# Altium PCB SNA.PcbDoc (part 4 of 6)
Units mm, origin at the board's own origin, x right, y up, seen from the top; angles counter-clockwise.
Board outline 122 x 98 mm, 4 copper layers (L1 Top Layer, L2 Inner 1, L3 Inner 2, L4 Bottom Layer), stack 1.588 mm thick; 466 components, 299 nets, 1366 pads, 4218 vias.
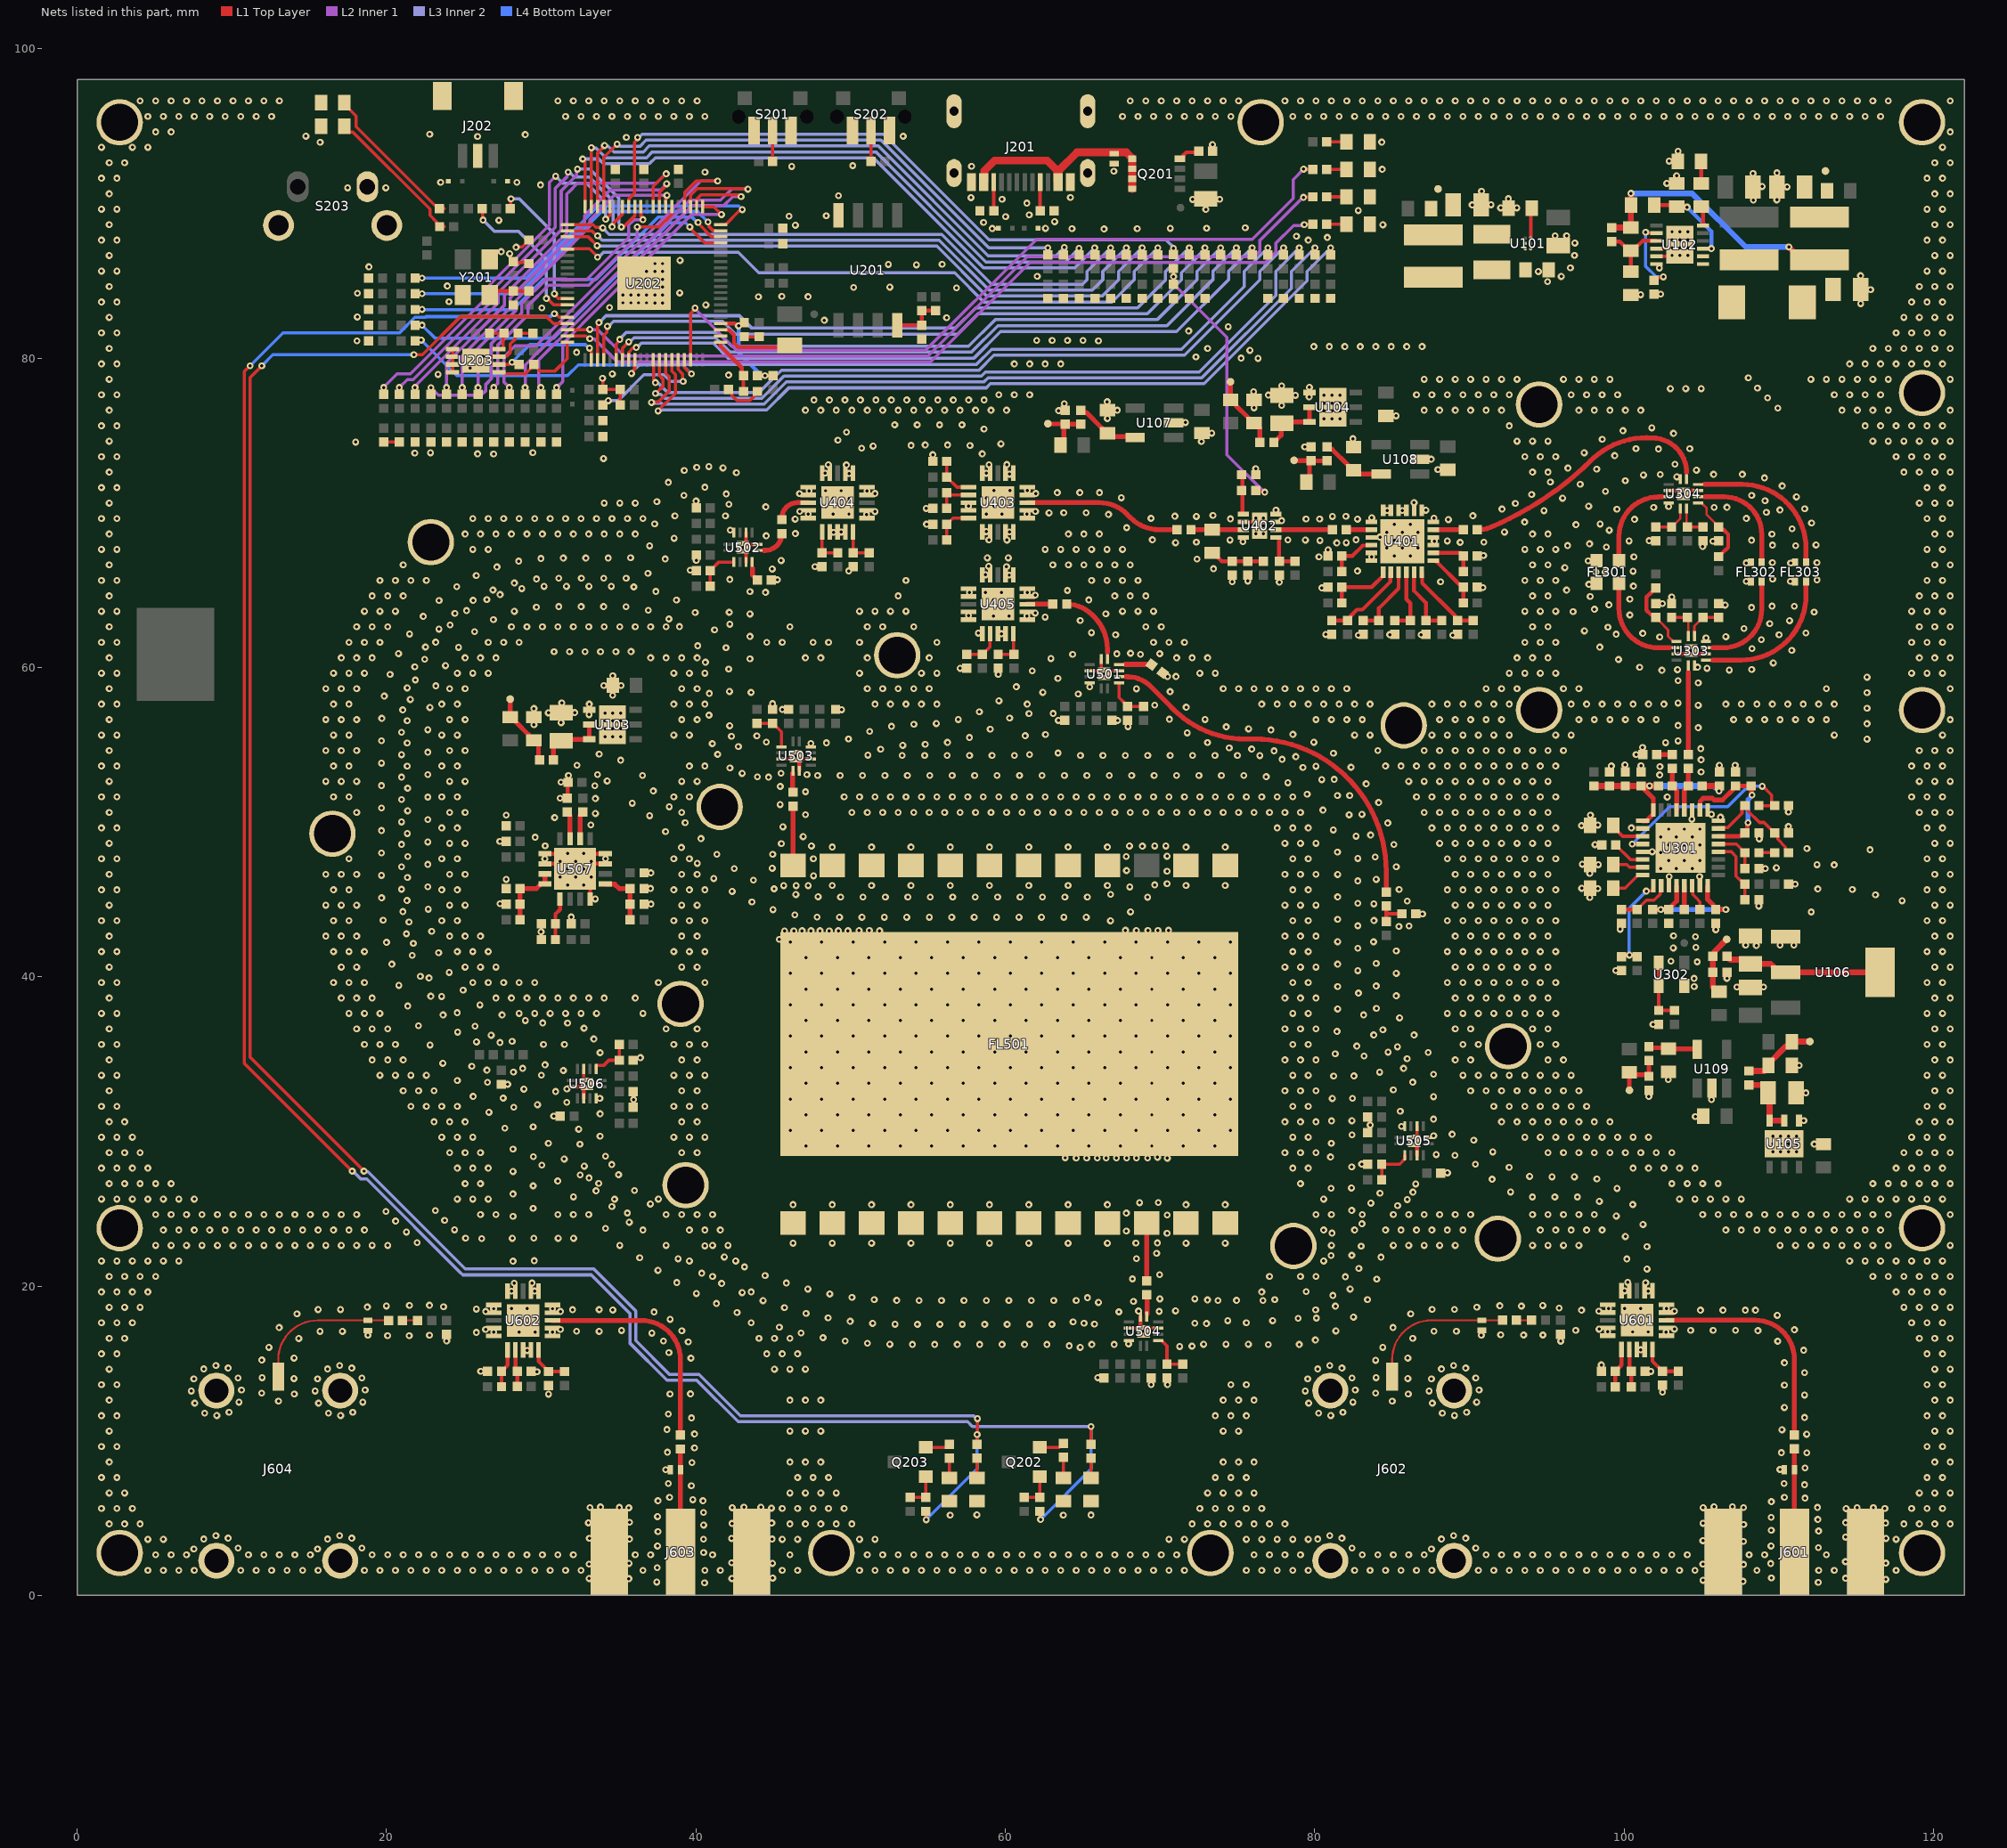
[diagram p6: the nets of this part, all layers, seen from the top]

## Via types
v1: diameter 0.45, hole 0.2, L1 Top Layer to L4 Bottom Layer, tented both sides, 4218 vias

## Nets (pads, with @x,y where several pads share a name; then routed paths per layer and width w, separated by ;. In a path a pad name is that pad's centre, name@x,y a point inside that pad or via, vN(x,y) a via of type N, cw(c..) or ccw(c..) an arc to the next point about the centre after c; other vN are vias at no path point) (continued)
GND: (continued)
  other v1: 118.572,83.625 119.572,83.625 120.572,83.625 24.033,83.647 44.036,83.963 47.241,83.972 45.548,83.995 37.338,84.074 37.846,84.074 35.276,84.08 35.784,84.08 36.292,84.08 36.8,84.08 101.064,84.096 102.349,84.138 18.116,84.186 38.947,84.215 115.929,84.418 56.835,84.539 37.338,84.582 37.846,84.582 50.19,84.561 35.784,84.588 36.292,84.588 36.8,84.588 52.533,84.589 2.072,84.625 119.072,84.625 120.072,84.625 121.072,84.625 23.922,84.666 95.041,84.936 37.338,85.09 37.846,85.09 36.292,85.096 36.8,85.096 62.063,85.281 95.929,85.273 115.272,85.326 37.338,85.598 37.846,85.598 94.453,85.593 36.8,85.604 1.572,85.625 2.572,85.625 119.572,85.625 120.572,85.625 102.275,85.822 96.518,85.83 18.86,85.897 54.25,86.027 52.435,86.051 55.91,86.064 37.338,86.106 37.846,86.106 38.969,86.314 2.072,86.625 103.599,86.63 104.107,86.63 120.072,86.625 121.072,86.625 96.786,86.644 103.599,87.138 104.107,87.138 96.807,87.432 1.572,87.625 2.572,87.625 79.572,87.625 119.572,87.625 120.572,87.625 103.091,87.646 103.599,87.646 104.107,87.646 80.807,87.8 78.814,87.877 95.533,87.902 96.269,87.902 103.091,88.154 103.599,88.154 104.107,88.154 64.305,88.364 66.377,88.343 68.523,88.364 59.151,88.377 62.588,88.388 70.658,88.385 73.005,88.4 75.504,88.423 46.429,88.583 84.397,88.619 2.072,88.625 120.072,88.625 121.072,88.625 58.584,88.765 63.18,88.814 27.258,88.904 60.014,89.14 46.017,89.176 48.419,89.196 61.541,89.262 82.805,89.538 1.572,89.625 2.572,89.625 72.951,89.614 119.572,89.625 120.572,89.625 92.015,89.712 93.06,89.712 90.172,89.904 91.385,89.91 61.388,90.021 108.341,90.219 109.859,90.227 59.782,90.271 72.097,90.255 73.849,90.27 92.513,90.307 57.776,90.372 64.202,90.384 49.213,90.492 2.072,90.625 120.072,90.625 121.072,90.625 90.772,90.781 17.482,91.004 19.949,91.004 110.522,91.064 108.914,91.09 29.948,91.2 102.752,91.291 23.488,91.365 28.428,91.36 1.572,91.625 2.572,91.625 119.572,91.625 120.572,91.625 103.387,91.782 108.323,91.932 109.869,91.973 40.584,92.02 67.016,92.08 84.355,92.201 46.183,92.387 57.813,92.392 50.131,92.44 2.072,92.625 3.072,92.625 120.072,92.625 121.072,92.625 102.899,92.731 103.477,93.365 1.572,93.625 3.572,93.625 4.572,93.625 120.572,93.625 73.388,93.8 15.709,93.948 84.324,93.959 35.496,94.265 25.884,94.323 14.784,94.342 53.395,94.34 28.963,94.447 22.793,94.466 5.072,94.625 6.072,94.625 121.072,94.625 4.572,95.625 5.572,95.625 6.572,95.625 7.572,95.625 8.572,95.625 9.572,95.625 10.572,95.625 11.572,95.625 12.572,95.625 31.572,95.625 32.572,95.625 33.572,95.625 34.572,95.625 35.572,95.625 36.572,95.625 37.572,95.625 38.572,95.625 39.572,95.625 40.572,95.625 67.572,95.625 68.572,95.625 69.572,95.625 70.572,95.625 71.572,95.625 72.572,95.625 73.572,95.625 74.572,95.625 78.572,95.625 79.572,95.625 80.572,95.625 81.572,95.625 82.572,95.625 83.572,95.625 84.572,95.625 85.572,95.625 86.572,95.625 87.572,95.625 88.572,95.625 89.572,95.625 90.572,95.625 91.572,95.625 92.572,95.625 93.572,95.625 94.572,95.625 95.572,95.625 96.572,95.625 97.572,95.625 98.572,95.625 99.572,95.625 100.572,95.625 101.572,95.625 102.572,95.625 103.572,95.625 104.572,95.625 105.572,95.625 106.572,95.625 107.572,95.625 108.572,95.625 109.572,95.625 110.572,95.625 111.572,95.625 112.572,95.625 113.572,95.625 114.572,95.625 115.572,95.625 116.572,95.625 4.072,96.625 5.072,96.625 6.072,96.625 7.072,96.625 8.072,96.625 9.072,96.625 10.072,96.625 11.072,96.625 12.072,96.625 13.072,96.625 31.072,96.625 32.072,96.625 33.072,96.625 34.072,96.625 35.072,96.625 36.072,96.625 37.072,96.625 38.072,96.625 39.072,96.625 40.072,96.625 68.072,96.625 69.072,96.625 70.072,96.625 71.072,96.625 72.072,96.625 73.072,96.625 74.072,96.625 75.072,96.625 78.072,96.625 79.072,96.625 80.072,96.625 81.072,96.625 82.072,96.625 83.072,96.625 84.072,96.625 85.072,96.625 86.072,96.625 87.072,96.625 88.072,96.625 89.072,96.625 90.072,96.625 91.072,96.625 92.072,96.625 93.072,96.625 94.072,96.625 95.072,96.625 96.072,96.625 97.072,96.625 98.072,96.625 99.072,96.625 100.072,96.625 101.072,96.625 102.072,96.625 103.072,96.625 104.072,96.625 105.072,96.625 106.072,96.625 107.072,96.625 108.072,96.625 109.072,96.625 110.072,96.625 111.072,96.625 112.072,96.625 113.072,96.625 114.072,96.625 115.072,96.625 116.072,96.625 117.072,96.625 121.072,96.625
I2C0.SCL: R229.1 U202.42 U203.6 | length 7.8
  L1 Top Layer w0.203: U203.6@27.271,79.585 U203.6@27.271,79.585 27.906,79.583 28.048,79.725 v1(28.114,79.725) 28.162,79.678 28.459,79.678 28.468,79.686 R229.1@28.569,79.585 ; v1(33.12,80.643) 33.12,80.576 33.24,80.456 33.24,79.887 U202.42@33.241,79.885
  L4 Bottom Layer w0.203: v1(28.114,79.725) 29.255,80.866 30.799,80.866 32.846,80.866 33.069,80.643 v1(33.12,80.643)
I2C0.SDA: R230.1 U202.40 U203.5 | length 6.3
  L1 Top Layer w0.203: U203.5@27.271,79.085 27.546,79.085 27.654,78.977 28.956,78.977 29.312,79.333 29.312,79.387 R230.1@29.51,79.585 29.955,79.14 30.858,79.14 31.677,79.959 31.677,81.034 31.678,81.035 U202.40@31.691,81.035
L_Booted: R209.2 U202.58 | length 50.1
  L1 Top Layer w0.203: U202.58@39.641,79.885 39.641,82.865 39.943,83.167 v1(39.943,83.234) ; v1(79.274,92.211) 79.283,92.202 R209.2@79.872,92.202
  L2 Inner 1 w0.203: v1(39.943,83.234) 39.943,83.186 42.564,80.565 42.615,80.514 54.843,80.514 61.264,86.935 61.274,86.935 62.017,87.679 75.961,87.679 78.6,90.318 78.6,91.537 v1(79.274,92.211)
L_Busy: R258.2 U202.39 | length 52.9
  L1 Top Layer w0.203: U202.39@31.691,81.435 32.879,81.435 32.941,81.373 32.949,81.373 33.073,81.25 v1(33.14,81.25) ; v1(79.313,88.621) 79.339,88.646 R258.2@79.872,88.646
  L2 Inner 1 w0.203: v1(33.14,81.25) 33.171,81.218 33.451,81.218 34.92,79.749 42.564,79.749 55.155,79.749 55.193,79.787 55.206,79.787 61.592,86.173 76.807,86.173 77.47,86.836 77.47,87.408 78.635,88.574 79.266,88.574 v1(79.313,88.621)
L_Port1_Out_EN: R225.2 R260.1 U202.36 | length 141.9
  L1 Top Layer w0.203: v1(11.176,79.502) 10.81,79.136 10.81,34.402 v1(17.78,27.432) ; v1(30.851,82.869) 30.917,82.869 31.149,82.637 31.69,82.637 U202.36@31.691,82.635 ; R260.1@62.23,5.438 62.23,4.958 v1(62.274,4.914) ; R225.2@65.532,9.778 v1(65.532,10.922)
  L3 Inner 2 w0.203: v1(17.78,27.432) 17.829,27.432 18.333,26.928 18.714,26.928 24.813,20.828 24.829,20.828 24.933,20.724 33.235,20.724 35.726,18.233 35.726,16.317 38.125,13.917 40.042,13.917 42.73,11.229 57.556,11.229 57.863,10.922 v1(65.532,10.922)
  L4 Bottom Layer w0.203: v1(11.176,79.502) 13.306,81.632 20.838,81.632 21.836,82.63 22.515,82.63 22.565,82.68 30.595,82.68 30.784,82.869 30.799,82.869 v1(30.851,82.869) ; v1(62.274,4.914) 65.532,8.171 v1(65.532,10.922)
L_Port_Z50: R227.2 R263.1 U202.37 | length 133.2
  L1 Top Layer w0.203: v1(11.938,79.502) 11.191,78.755 11.191,34.783 v1(18.542,27.432) ; v1(21.765,80.221) 22.326,80.221 24.784,82.68 30.337,82.68 30.781,82.235 U202.37@31.691,82.235 ; R263.1@54.864,5.438 54.864,4.915 v1(54.884,4.896) ; R227.2@58.166,9.778 58.168,9.78 58.168,10.396 v1(58.17,10.398) 58.182,10.41 58.182,11.414 v1(58.194,11.426)
  L3 Inner 2 w0.203: v1(18.542,27.432) 18.589,27.385 18.811,27.385 25.091,21.105 33.393,21.105 36.107,18.391 36.107,16.474 38.283,14.298 40.2,14.298 42.88,11.618 57.952,11.618 58.144,11.426 v1(58.194,11.426)
  L4 Bottom Layer w0.203: v1(11.938,79.502) 12.657,80.221 v1(21.765,80.221) ; v1(54.884,4.896) 58.17,8.182 v1(58.17,10.398)
L_Ready: R259.2 U202.38 | length 53.6
  L1 Top Layer w0.203: U202.38@31.691,81.835 31.693,81.837 33.124,81.837 v1(33.14,81.852) ; v1(79.267,90.393) 79.283,90.408 79.856,90.408 R259.2@79.872,90.424
  L2 Inner 1 w0.203: v1(33.14,81.852) 33.174,81.818 33.669,81.818 35.357,80.13 54.997,80.13 61.421,86.554 76.087,86.554 76.458,86.925 76.458,87.612 79.238,90.393 v1(79.267,90.393)
NetC104_2: C104.2 R102.1 | length 1.4
  L1 Top Layer w0.254: C104.2@104.958,92.724 104.967,92.715 R102.1@104.967,91.295
NetC105_1: C105.1 R103.2 R104.1 U102.3 | length 4.8
  L1 Top Layer w0.254: C105.1@99.187,87.536 99.193,87.529 99.719,87.529 100.039,87.209 100.164,87.209 R104.1@100.437,86.936 ; R103.2@100.437,85.577 R104.1@100.437,86.936 ; U102.3@102.091,87.577 101.19,87.577 100.822,87.209 100.71,87.209 R104.1@100.437,86.936
NetC105_2: C105.2 C107.2 D101.2 L104.1 R104.2 R106.2 | length 17.5
  L1 Top Layer w0.381: C105.2@99.187,88.436 R104.2@100.437,88.436 100.435,88.437 100.435,90.65 v1(100.434,90.651) ; v1(110.639,87.188) 110.639,87.169 110.904,86.904 110.904,86.845 112.143,86.845 L104.1@112.628,86.361
  L4 Bottom Layer w0.381: v1@100.444,90.641 104.395,90.641 107.851,87.185 v1@110.636,87.185
NetC106_2: C106.2 L102.2 L103.1 U101.A2
NetC108_2: C108.2 L103.2 R107.1 TP101.1
NetC109_2: C109.2 L104.2 R108.1 TP102.1
NetC113_2: C113.2 L105.1 U103.2 U103.3 | length 4.4
  L1 Top Layer w0.305: L105.1@30.792,54.016 30.792,54.917 31.139,55.264 C113.2@31.3,55.264 cw(c31.388,55.264) 31.388,55.352 U103.3@33.102,55.352 U103.2@33.102,56.302
NetC114_2: C114.2 L106.1 U104.2 U104.3 | length 4.2
  L1 Top Layer w0.305: L106.1@77.351,74.535 77.821,75.005 77.821,75.745 C114.2@77.859,75.783 77.947,75.871 U104.3@79.661,75.871 U104.2@79.661,76.821
NetC115_2: C115.2 L107.1 U105.2 U105.3 | length 4.4
  L1 Top Layer w0.381: L107.1@108.057,33.008 108.995,33.008 109.305,32.699 C115.2@109.305,32.5 109.393,32.412 U105.3@109.393,30.698 U105.2@110.343,30.698
NetC116_2: C116.2 L105.2 R109.1 TP103.1 | length 4.7
  L1 Top Layer w0.305: TP103.1@27.988,57.952 27.988,56.796 R109.1@27.998,56.786 ; R109.1@28.098,56.786 28.345,56.539 28.345,56.485 29.174,55.657 29.174,55.534 29.399,55.309 C116.2@29.522,55.309 ; C116.2@29.622,55.286 29.823,55.085 29.823,54.085 L105.2@29.892,54.016
NetC117_2: C117.2 L106.2 R110.1 TP104.1 | length 4.7
  L1 Top Layer w0.305: TP104.1@74.547,78.471 74.547,77.315 R110.1@74.557,77.305 ; R110.1@74.657,77.305 74.905,77.058 74.905,76.927 75.734,76.099 75.734,76.053 75.981,75.805 C117.2@76.081,75.805 ; C117.2@76.181,75.805 76.451,75.535 L106.2@76.451,74.535
NetC118_2: C118.2 L107.2 R111.1 TP105.1 | length 4.7
  L1 Top Layer w0.381: L107.2@108.057,33.908 109.057,33.908 C118.2@109.327,34.178 ; C118.2@109.327,34.278 109.327,34.378 110.441,35.493 110.617,35.493 R111.1@110.827,35.702 ; R111.1@110.827,35.802 110.832,35.807 111.988,35.807 TP105.1@111.993,35.813
NetC123_2: C123.2 L108.1 U107.5 | length 4.3
  L1 Top Layer w0.305: L108.1@64.878,76.629 65.025,76.481 65.234,76.481 66.254,75.462 66.254,75.374 66.502,75.126 C123.2@66.59,75.126 ; C123.2@66.602,75.126 66.81,74.917 68.334,74.917 U107.5@68.38,74.872
NetC124_2: C124.2 L109.1 U108.5 | length 4.2
  L1 Top Layer w0.305: L109.1@80.783,74.257 80.931,74.109 81.111,74.109 82.16,73.06 82.16,73.001 82.407,72.754 C124.2@82.507,72.754 ; C124.2@82.607,72.754 82.861,72.5 U108.5@84.285,72.5
NetC125_2: C125.2 L110.1 U109.5 | length 3.2
  L1 Top Layer w0.305: L110.1@101.593,35.481 101.662,35.412 102.794,35.412 C125.2@102.863,35.343 104.667,35.343 U109.5@104.707,35.303
NetC126_2: C126.2 L111.1 U106.2 U106.4 | length 10.4
  L1 Top Layer w0.381: L111.1@106.636,41.311 106.839,41.109 107.887,41.109 C126.2@108.16,40.835 109.463,40.835 109.687,40.612 109.687,40.555 109.946,40.295 U106.2@110.446,40.295 U106.4@116.546,40.295
NetC127_2: C127.2 L108.2 R112.1 TP106.1 | length 3.6
  L1 Top Layer w0.305: TP106.1@62.749,75.758 62.763,75.743 63.847,75.743 C127.2@63.862,75.729 ; R112.1@63.554,74.364 63.773,74.583 63.773,75.64 C127.2@63.862,75.729 ; L108.2@64.878,75.729 C127.2@63.862,75.729
NetC128_2: C128.2 L109.2 R113.1 TP107.1 | length 3.6
  L1 Top Layer w0.305: TP107.1@78.655,73.385 78.669,73.371 79.656,73.371 79.753,73.371 C128.2@79.767,73.357 ; R113.1@79.459,71.992 79.656,72.188 79.656,73.245 C128.2@79.767,73.357 ; L109.2@80.783,73.357 C128.2@79.767,73.357
NetC129_2: C129.2 L110.2 R114.1 TP108.1 | length 3.5
  L1 Top Layer w0.305: TP108.1@100.331,32.665 100.331,33.812 R114.1@100.323,33.819 100.477,33.665 101.493,33.665 C129.2@101.593,33.565 L110.2@101.593,34.581
NetC130_2: C130.2 L111.2 R115.1 TP109.1 | length 4
  L1 Top Layer w0.381: R115.1@106.128,39.025 106.028,39.025 105.736,39.317 C130.2@105.736,40.295 L111.2@105.736,41.311 105.846,41.421 105.846,41.642 TP109.1@106.628,42.424
NetC131_2: C131.2 U102.2 | length 5.1
  L1 Top Layer w0.203: v1(101.387,88.139) 101.449,88.077 U102.2@102.091,88.077 ; C131.2@101.922,85.032 102.09,85.2 102.48,85.2 v1(102.527,85.247)
  L4 Bottom Layer w0.203: v1(101.387,88.139) 101.387,85.932 102.072,85.247 v1(102.527,85.247)
NetC201_2: C201.2 R203.2 Y201.3 | length 2.6
  L1 Top Layer w0.254: Y201.3@26.67,84.074 26.924,84.328 C201.2@28.194,84.328 R203.2@29.21,84.328
NetC203_2: C203.2 L201.2 R206.2 U201.8 | length 3.4
  L1 Top Layer w0.254: U201.8@53.017,82.125 C203.2@54.589,82.125 54.59,82.126 54.59,83.059 R206.2@54.591,83.06 L201.2@55.489,83.06
NetC205_2: C205.2 L202.2 R208.1 U202.64 | length 6.3
  L1 Top Layer w0.254: U202.64@41.889,82.23 42.504,82.23 42.564,82.171 42.617,82.118 v1@42.661,82.118 ; v1(42.751,82.081) C205.2@42.902,82.231 ; C205.2@42.954,82.118 C205.2@43.12,82.284 ; R208.1@43.966,78.858 43.971,78.862 44.459,78.862 v1(44.464,78.867) ; v1@44.454,78.858 L202.2@44.982,78.858
  L4 Bottom Layer w0.254: v1(42.751,82.081) 42.751,80.358 44.205,78.904 44.426,78.904 v1(44.464,78.867)
NetC207_2: C207.2 R208.2 U202.61 | length 3.8
  L1 Top Layer w0.254: U202.61@41.591,80.989 41.591,80.765 42.967,79.389 42.967,78.957 R208.2@43.066,78.858 ; C207.2@43.066,77.842 R208.2@43.066,78.858 ; R208.2@43.066,78.923 R208.2@43.066,78.858
NetC222_1: C222.1 L205.1 U203.8 | length 2.2
  L1 Top Layer w0.203: L205.1@26.654,81.609 26.657,81.612 27.592,81.612 C222.1@27.595,81.615 27.522,81.543 27.522,80.634 27.474,80.585 U203.8@27.271,80.585
NetC302_2: C302.2 R301.1 U301.25 | length 6.5
  L1 Top Layer w0.203: C302.2@99.815,41.299 99.866,41.35 100.281,41.35 v1(100.329,41.397) 100.376,41.35 100.78,41.35 R301.1@100.831,41.299 ; v1(101.428,45.537) 101.449,45.558 101.838,45.558 101.887,45.607 U301.25@101.887,45.882
  L4 Bottom Layer w0.203: v1(100.329,41.397) 100.323,41.403 100.323,44.433 v1(101.428,45.537)
NetC304_2: C304.2 U301.29 | length 1.5
  L1 Top Layer w0.32: C304.2@103.887,44.338 U301.29@103.887,45.882
NetC305_2: C305.2 R304.1 U301.4 | length 4.4
  L1 Top Layer w0.203: U301.4@106.087,48.082 106.135,48.033 106.454,48.033 106.505,48.085 106.923,48.085 107.226,47.782 107.226,46.511 107.552,46.186 107.607,46.186 R304.1@107.805,45.987 C305.2@107.805,44.971
NetC306_1: C306.1 C309.1 L301.2 U301.28 U301.32 | length 9.4
  L1 Top Layer w0.305: L301.2@101.847,44.347 101.85,44.345 102.364,44.345 v1(102.366,44.343) 102.369,44.345 102.861,44.345 103.011,44.495 103.011,44.516 103.387,44.891 U301.28@103.387,45.882 ; U301.32@105.387,45.882 105.387,45 105.764,44.623 105.764,44.495 C309.1@105.911,44.347 v1(106.568,44.347)
  L4 Bottom Layer w0.305: v1(102.366,44.343) 102.369,44.345 106.565,44.345 v1(106.568,44.347)
NetC307_1: C307.1 C310.1 L302.2 U301.6 U301.10 | length 9.5
  L1 Top Layer w0.305: U301.10@104.887,50.782 104.887,51.052 104.907,51.072 104.907,51.344 105.1,51.537 105.691,51.537 105.797,51.431 106.353,51.431 107.034,52.112 107.034,52.19 C310.1@107.181,52.337 L302.2@108.197,52.337 108.228,52.307 108.228,51.769 v1(108.255,51.741) ; U301.6@106.087,49.082 106.089,49.084 107.479,49.084 107.537,49.142 107.658,49.142 107.953,49.437 107.953,49.874 108.005,49.926 v1(108.005,49.965)
  L4 Bottom Layer w0.305: v1(108.005,49.965) 108.005,51.451 108.255,51.702 v1(108.255,51.741)
NetC308_1: C308.1 C311.1 C315.1 C319.1 L303.2 R306.2 R307.2 U301.16 U301.17 | length 13.3
  L1 Top Layer w0.305: C315.1@101.085,52.337 101.887,51.536 U301.16@101.887,50.782 101.887,50.512 101.459,50.084 101.457,50.082 U301.17@101.187,50.082
  L1 Top Layer w0.381: L303.2@98.037,52.337 C308.1@99.053,52.337 C311.1@100.069,52.337 C315.1@101.085,52.337 R307.2@102.217,52.337 ; R306.2@105.033,52.337 C319.1@106.165,52.337 106.14,52.312 106.14,52.03 v1(106.127,52.017)
  L4 Bottom Layer w0.381: v1(101.633,52.337) 102.875,52.337 105.806,52.337 v1@106.113,52.03
NetC312_2: C312.2 U301.24 | length 2.3
  L1 Top Layer w0.203: C312.2@99.283,45.733 100.063,45.733 100.912,46.582 U301.24@101.187,46.582
NetC313_2: C313.2 U301.19 | length 2.3
  L1 Top Layer w0.203: C313.2@99.283,49.797 99.283,49.697 99.899,49.082 U301.19@101.187,49.082
NetC314_1: C314.1 R307.1 U301.13 | length 2.8
  L1 Top Layer w0.32: C314.1@103.117,53.469 R307.1@103.117,52.337 103.387,52.068 U301.13@103.387,50.782
NetC314_2: C314.2 R308.2 | length 1
  L1 Top Layer w0.32: R308.2@102.101,54.369 C314.2@103.117,54.369
NetC316_2: C316.2 U301.23 | length 2
  L1 Top Layer w0.203: C316.2@99.283,47.257 100.159,47.257 100.335,47.082 U301.23@101.187,47.082
NetC317_2: C317.2 C318.1 R309.1 U301.7 | length 6.9
  L1 Top Layer w0.203: U301.7@106.087,49.582 106.135,49.63 106.68,49.63 107.612,50.561 107.612,50.873 R309.1@107.805,51.067 108.004,50.869 108.004,50.711 108.741,49.974 109.037,49.974 109.92,49.091 109.92,48.886 110.423,48.383 110.423,48.218 C318.1@110.621,48.019
NetC318_2: C318.2 R310.2 | length 1
  L1 Top Layer w0.203: R310.2@108.705,48.019 C318.2@109.721,48.019
NetC320_1: C320.1 R306.1 U301.12 | length 2.7
  L1 Top Layer w0.32: U301.12@103.887,50.782 103.887,52.091 R306.1@104.133,52.337 C320.1@104.133,53.419
NetC320_2: C320.2 U303.7 | length 5.3
  L1 Top Layer w0.32: C320.2@104.133,54.369 104.133,59.7
NetC321_1: C321.1 R309.2 U301.20 | length 13.3
  L1 Top Layer w0.203: v1(100.512,48.577) 100.514,48.58 101.185,48.58 U301.20@101.187,48.582 ; R309.2@108.705,51.067 C321.1@109.721,51.067 109.523,51.266 109.523,51.749 108.96,52.312 v1(108.924,52.312)
  L4 Bottom Layer w0.203: v1(100.512,48.577) 102.875,50.941 102.936,51.002 104.399,51.002 106.686,51.002 108.014,52.329 108.907,52.329 v1(108.924,52.312)
NetC322_2: C322.2 L304.1 U302.1 U302.4 | length 4.1
  L1 Top Layer w0.254: U302.4@102.229,40.907 U302.1@102.229,39.407 C322.2@102.229,37.825 L304.1@103.245,37.825
NetC325_1: C325.1 L305.2 U303.3 | length 4.6
  L1 Top Layer w0.152: C325.1@102.047,63.224 102.271,63 102.271,62.985 102.83,62.426 102.83,62.02 103.135,61.715 103.135,61.699 103.158,61.676 U303.3@103.383,61.676
  L1 Top Layer w0.254: C325.1@101.986,63.285 101.874,63.397 101.743,63.397 101.443,63.697 101.443,64.55 101.622,64.729 101.637,64.729 L305.2@102.047,65.14
NetC328_1: C328.1 L306.2 U304.3 | length 3.9
  L1 Top Layer w0.152: U304.3@105.026,70.603 105.329,70.3 105.329,69.877 C328.1@105.888,69.318
  L1 Top Layer w0.254: L306.2@106.111,67.163 106.522,67.573 106.537,67.573 106.716,67.753 106.716,68.605 106.416,68.906 C328.1@106.284,68.906
NetC329_1: C329.1 U304.7 | length 16.6
  L1 Top Layer w0.32: C329.1@90.492,68.906 ccw(c90.611,70.777) 91.338,69.049 ccw(c90.611,70.777) 91.34,69.05 ccw(c82.964,88.904) 94.996,71.027 ccw(c84.403,86.767) 97.821,73.354 ; 97.821,73.355 cw(c101.434,69.741) 101.81,74.837 cw(c101.799,72.611) 104.021,72.752 cw(c101.799,72.611) 104.025,72.611
NetC329_2: C329.2 U401.5 | length 1.9
  L1 Top Layer w0.32: U401.5@87.666,68.906 C329.2@89.592,68.906
NetC331_2: C331.2 R302.1 U301.26 | length 3.5
  L1 Top Layer w0.203: R302.1@100.831,44.347 101.428,44.943 101.919,44.943 102.338,45.363 102.338,45.833 U301.26@102.387,45.882
  L1 Top Layer w0.254: C331.2@99.815,44.347 R302.1@100.831,44.347
NetC409_2: C409.2 R401.1 U401.19 | length 4.2
  L1 Top Layer w0.254: R401.1@81.74,64.167 C409.2@81.74,65.183 83.668,65.183 84.416,65.931 U401.19@84.416,66.156
NetC410_2: C410.2 R402.1 U401.20 | length 5.5
  L1 Top Layer w0.254: C410.2@81.094,63.035 R402.1@82.11,63.035 82.283,63.208 82.283,63.293 82.725,63.735 83.079,63.735 84.893,65.549 84.893,66.133 U401.20@84.916,66.156
NetC411_2: C411.2 R403.1 U401.21 | length 4.7
  L1 Top Layer w0.254: C411.2@83.126,63.035 R403.1@84.142,63.035 84.142,63.827 85.416,65.101 U401.21@85.416,66.156
NetC412_2: C412.2 R404.1 U401.22 | length 4.2
  L1 Top Layer w0.254: C412.2@85.158,63.035 R404.1@86.174,63.035 86.174,64.158 85.916,64.416 U401.22@85.916,66.156
NetC413_2: C413.2 R405.1 U401.23 | length 4.5
  L1 Top Layer w0.254: U401.23@86.416,66.156 86.416,64.946 87.19,64.172 C413.2@87.19,63.035 R405.1@88.206,63.035
NetC414_2: C414.2 R406.1 U401.24 | length 5.1
  L1 Top Layer w0.254: U401.24@86.916,66.156 86.939,66.133 86.939,65.451 89.049,63.341 89.049,63.208 C414.2@89.222,63.035 R406.1@90.238,63.035
NetC415_2: C415.2 R407.1 U401.1 | length 3.7
  L1 Top Layer w0.254: U401.1@87.666,66.906 87.891,66.906 87.914,66.883 87.914,66.79 89.348,65.356 89.419,65.356 C415.2@89.592,65.183 R407.1@89.592,64.167
NetC416_2: C416.2 R408.1 U401.16 | length 3.2
  L1 Top Layer w0.254: R408.1@81.74,66.199 C416.2@81.74,67.215 82.438,67.215 83.106,67.883 83.643,67.883 U401.16@83.666,67.906
NetC417_1: C417.1 L401.2 U401.2 | length 3.1
  L1 Top Layer w0.254: U401.2@87.666,67.406 89.401,67.406 cw(c89.401,67.215) C417.1@89.592,67.215 L401.2@89.592,66.199
NetC418_1: C418.1 U401.14 | length 1.4
  L1 Top Layer w0.32: C418.1@82.046,68.9 82.34,68.9 U401.14@83.451,68.9
NetC418_2: C418.2 U402.2 | length 3.7
  L1 Top Layer w0.32: U402.2@77.481,68.906 C418.2@81.14,68.906
NetC419_2: C419.2 R241.2 R409.1 | length 18.1
  L1 Top Layer w0.203: C419.2@70.865,84.758 R241.2@70.865,85.789 ; R409.1@76.177,71.442 76.238,71.381 76.716,71.381 v1(76.763,71.334)
  L2 Inner 1 w0.203: v1(70.866,85.269) 70.913,85.222 70.913,84.745 74.324,81.334 74.324,73.745 76.736,71.334 v1(76.763,71.334)
NetC420_2: C420.2 L402.2 U402.1 | length 2.7
  L1 Top Layer w0.254: U402.1@77.481,68.406 77.67,68.406 77.693,68.383 77.693,68.156 C420.2@77.693,66.879 ; C420.2@77.701,66.87 L402.2@78.717,66.87
NetC421_2: C421.2 R409.2 U402.5 | length 2.6
  L1 Top Layer w0.254: C421.2@75.277,72.458 75.329,72.406 75.329,69.929 75.352,69.906 U402.5@75.381,69.906
NetC422_2: C422.2 C425.2 L403.2 L404.2 | length 3.6
  L1 Top Layer w0.254: L403.2@73.375,67.406 73.475,67.406 73.748,67.133 73.748,67.095 73.972,66.87 C422.2@74.653,66.87 C425.2@75.669,66.87 L404.2@76.685,66.87
NetC426_1: C426.1 L403.1 U402.7 | length 3.4
  L1 Top Layer w0.32: C426.1@71.997,68.906 L403.1@73.375,68.906 U402.7@75.381,68.906
NetC426_2: C426.2 U403.8 | length 10.2
  L1 Top Layer w0.32: U403.8@61.412,70.653 66.067,70.653 cw(c66.067,68.113) 67.863,69.909 68.123,69.649 ccw(c69.918,71.446) 69.918,68.906 C426.2@71.097,68.906
NetC427_2: C427.2 R410.1 U403.17 | length 2.2
  L1 Top Layer w0.203: C427.2@56.21,70.277 56.21,71.018 56.345,71.153 U403.17@57.612,71.153
NetC428_2: C428.2 R411.1 U403.16 | length 2.7
  L1 Top Layer w0.203: C428.2@56.21,73.325 R411.1@56.21,72.309 56.866,71.653 U403.16@57.612,71.653
NetC429_2: C429.2 L405.2 U403.20 | length 2.6
  L1 Top Layer w0.203: L405.2@56.21,68.245 C429.2@56.21,69.261 56.602,69.653 U403.20@57.612,69.653
NetC432_2: C432.2 R412.1 U405.17 | length 2.6
  L1 Top Layer w0.203: C432.2@57.501,60.847 R412.1@58.517,60.847 59.012,61.342 U405.17@59.012,62.185
NetC433_2: C433.2 R413.1 U404.16 | length 2.4
  L1 Top Layer w0.203: C433.2@48.138,67.415 48.138,68.714 cw(c48.193,68.714) U404.16@48.154,68.753 ; C433.2@48.143,67.41 49.16,67.41 R413.1@49.165,67.405
NetC434_2: C434.2 L406.2 U404.20 | length 2.4
  L1 Top Layer w0.203: U404.20@50.154,68.753 50.162,68.745 50.162,67.423 C434.2@50.17,67.415 L406.2@51.186,67.415
NetC435_2: C435.2 L407.2 U405.20 | length 2.4
  L1 Top Layer w0.203: C435.2@59.533,60.847 L407.2@60.549,60.847 60.531,60.865 60.531,62.166 U405.20@60.512,62.185
NetC501_1: C501.1 U405.3 | length 1.7
  L1 Top Layer w0.32: U405.3@61.412,64.085 C501.1@63.066,64.085
NetC501_2: C501.2 U501.7 | length 4.5
  L1 Top Layer w0.32: C501.2@63.966,64.085 cw(c63.966,61.768) 65.605,63.406 65.728,63.283 65.73,63.282 cw(c63.642,61.194) 66.594,61.194 66.594,61.115 66.594,60.974
NetC502_1: C502.1 U404.13 | length 2.4
  L1 Top Layer w0.32: C502.1@45.552,69.551 45.552,69.65 cw(c46.555,69.65) 46.555,70.653 U404.13@47.254,70.653
NetC502_2: C502.2 U502.7 | length 1.8
  L1 Top Layer w0.32: 44.398,67.565 44.466,67.565 ccw(c44.466,68.651) C502.2@45.552,68.651
NetC505_2: C505.2 L501.2 U501.3 | length 2.8
  L1 Top Layer w0.203: U501.3@67.345,58.99 67.345,58.055 67.708,57.692 67.708,57.67 C505.2@67.906,57.472 L501.2@68.922,57.472
NetC506_2: C506.2 L502.2 U502.3 | length 2.8
  L1 Top Layer w0.203: L502.2@40.917,65.238 C506.2@40.917,66.254 41.479,66.816 U502.3@42.436,66.816
NetC509_2: C509.2 L503.2 U503.3 | length 2.8
  L1 Top Layer w0.203: L503.2@43.945,56.385 C509.2@44.961,56.385 45.522,55.824 U503.3@45.522,54.867
NetC514_2: C514.2 L504.2 U504.3 | length 2.7
  L1 Top Layer w0.203: U504.3@70.12,16.461 70.444,16.137 C514.2@70.444,14.958 L504.2@71.46,14.958
NetC519_2: C519.2 L505.2 U505.3 | length 2.9
  L1 Top Layer w0.203: L505.2@84.322,26.865 C519.2@84.322,27.881 85.477,27.881 85.817,28.221 U505.3@85.817,28.446
NetC520_2: C520.2 L506.2 U506.3 | length 2.9
  L1 Top Layer w0.203: U506.3@33.549,34.036 33.549,34.258 33.551,34.259 34.027,34.259 34.369,34.601 C520.2@35.045,34.601 L506.2@35.045,35.617
NetC521_2: C521.2 U507.15 | length 1.8
  L1 Top Layer w0.32: C521.2@31.678,50.649 31.861,50.466 U507.15@31.861,48.927
NetC522_2: C522.2 U507.14 | length 1.8
  L1 Top Layer w0.32: U507.14@32.511,48.927 32.511,50.466 C522.2@32.694,50.649
NetC525_2: C525.2 C526.2 L507.2 U507.9 | length 3.8
  L1 Top Layer w0.305: U507.9@34.136,46.002 34.156,45.982 34.753,45.982 35.028,45.707 C525.2@35.742,45.707 C526.2@35.742,44.691 L507.2@35.742,43.675
NetC529_2: C529.2 C530.2 L508.2 U507.3 U507.4 | length 4.4
  L1 Top Layer w0.305: L508.2@28.63,43.675 C529.2@28.63,44.691 C530.2@28.63,45.707 29.691,45.707 29.986,46.002 U507.4@30.236,46.002 U507.3@30.236,46.652
NetC531_2: C531.2 C532.2 U507.5 | length 2.7
  L1 Top Layer w0.254: C532.2@30.916,42.405 30.916,44.05 31.211,44.345 U507.5@31.211,45.027
NetC533_1: C533.1 U503.7 | length 1.2
  L1 Top Layer w0.32: C533.1@46.255,51.949 U503.7@46.255,53.152
NetC533_2: C533.2 FL501.24 | length 3.8
  L1 Top Layer w0.32: FL501.24@46.272,47.209 C533.2@46.272,51.031
NetC534_1: C534.1 FL501.10 | length 3.7
  L1 Top Layer w0.32: C534.1@69.128,20.347 69.128,24.076 FL501.10@69.132,24.08
NetC534_2: C534.2 U504.7 | length 1.3
  L1 Top Layer w0.32: C534.2@69.128,19.447 69.151,19.424 U504.7@69.151,18.192
NetC605_2: C605.2 R601.1 U601.17 | length 2.5
  L1 Top Layer w0.254: U601.17@100.324,15.892 100.347,15.869 100.347,14.6 C605.2@100.447,14.501 R601.1@100.447,13.485
NetC606_2: C606.2 R602.1 U601.16 | length 2.6
  L1 Top Layer w0.254: R602.1@99.431,13.485 C606.2@99.431,14.501 99.824,14.894 U601.16@99.824,15.892
NetC607_2: C607.2 R603.1 U602.17 | length 2.5
  L1 Top Layer w0.254: U602.17@28.324,15.88 28.347,15.857 28.347,14.589 C607.2@28.447,14.489 R603.1@28.447,13.473
NetC608_2: C608.2 R604.1 U602.16 | length 2.6
  L1 Top Layer w0.254: R604.1@27.431,13.473 C608.2@27.431,14.489 27.824,14.883 U602.16@27.824,15.88
NetC609_2: C609.2 L601.2 U601.20 | length 2.7
  L1 Top Layer w0.254: U601.20@101.824,15.892 101.824,15.145 C609.2@102.48,14.489 L601.2@103.496,14.489
NetC610_2: C610.2 L602.2 U602.20 | length 2.7
  L1 Top Layer w0.254: U602.20@29.824,15.88 29.824,15.134 C610.2@30.48,14.478 L602.2@31.496,14.478
NetC611_1: C611.1 U601.3 | length 14.6
  L1 Top Layer w0.32: U601.3@102.724,17.792 108.46,17.792 cw(c108.46,15.252) 111,15.252 C611.1@111,10.379
NetC611_2: C611.2 D601.2 J601.1 | length 6.7
  L1 Top Layer w0.32: J601.1@111,2.8 C611.2@111,9.479
NetC612_1: C612.1 R607.1 | length 1
  L1 Top Layer w0.128: C612.1@93.035,17.791 R607.1@94.015,17.792
NetC612_2: C612.2 D602.2 J602.1 | length 9.7
  L1 Top Layer w0.128: J602.1@85,14.147 85,15.251 cw(c87.54,15.251) 87.54,17.791 D602.2@90.796,17.791 C612.2@92.135,17.791
NetC613_1: C613.1 U602.3 | length 14.6
  L1 Top Layer w0.32: U602.3@30.724,17.78 36.46,17.78 cw(c36.46,15.24) 39,15.24 C613.1@39,10.367
NetC613_2: C613.2 D603.2 J603.1 | length 6.7
  L1 Top Layer w0.32: J603.1@39,2.8 C613.2@39,9.467
NetC614_1: C614.1 R608.1 | length 1
  L1 Top Layer w0.128: C614.1@21.035,17.78 R608.1@22.015,17.78
NetC614_2: C614.2 D604.2 J604.1 | length 9.7
  L1 Top Layer w0.128: J604.1@13,14.147 13,15.24 cw(c15.54,15.24) 15.54,17.78 D604.2@18.796,17.78 C614.2@20.135,17.78
NetD101_1: D101.1 L101.2 U102.7 U102.8
NetD206_1: D206.1 R222.1 | length 9.7
  L1 Top Layer w0.203: D206.1@17.26,96.52 17.26,96.42 18.034,95.646 18.034,94.949 23.123,89.86 23.228,89.86 R222.1@23.426,89.662 ; R222.1@23.582,89.818 23.738,89.662
NetD207_1: D207.1 R223.1 | length 9.5
  L1 Top Layer w0.203: D207.1@17.26,94.996 17.26,94.922 17.558,94.624 17.812,94.624 22.81,89.625 22.81,89.227 23.23,88.808 23.23,88.695 23.382,88.543 R223.1@23.495,88.543 ; R223.1@23.584,88.652 23.74,88.496
NetD208_1: D208.1 R224.1 | length 1.3
  L1 Top Layer w0.203: R224.1@80.772,93.98 D208.1@82.054,93.98
NetD209_1: D209.1 R225.1 | length 1.3
  L1 Top Layer w0.203: D209.1@65.532,7.596 R225.1@65.532,8.878
NetD210_1: D210.1 R226.1 | length 1.3
  L1 Top Layer w0.203: D210.1@63.754,7.596 R226.1@63.754,8.936
NetD211_1: D211.1 R227.1 | length 1.3
  L1 Top Layer w0.203: D211.1@58.166,7.596 R227.1@58.166,8.878
NetD212_1: D212.1 R258.1 | length 1.3
  L1 Top Layer w0.203: R258.1@80.772,88.646 D212.1@82.054,88.646
NetD213_1: D213.1 R209.1 | length 1.3
  L1 Top Layer w0.203: R209.1@80.772,92.202 D213.1@82.054,92.202
NetD214_1: D214.1 R259.1 | length 0.9
  L1 Top Layer w0.203: R259.1@80.772,90.424 81.654,90.424
NetD215_1: D215.1 R262.1 | length 1.3
  L1 Top Layer w0.203: D215.1@56.388,7.596 R262.1@56.388,8.878
NetD216_2: D216.2 J201.A4B9 J201.B4A9 Q201.5 Q201.6 Q201.7 Q201.8 | length 14.9
  L1 Top Layer w0.508: J201.B4A9@58.6,91.388 58.641,91.429 58.641,92.113 59.302,92.774 62.698,92.774 63.359,92.113 63.359,91.429 J201.A4B9@63.4,91.388 63.441,91.429 63.441,92.109 64.626,93.294 67.826,93.294 68.2,92.92 Q201.7@68.2,91.592 Q201.8@68.2,90.942
NetFL301_1: FL301.1 U303.4 | length 6.4
  L1 Top Layer w0.32: FL301.1@99.66,65.434 99.66,63.803 ccw(c102.199,63.803) 102.186,61.263 ccw(c102.199,63.803) 102.19,61.263 102.808,61.274 102.943,61.276
NetFL301_2: FL301.2 U304.11 | length 5.8
  L1 Top Layer w0.32: FL301.2@99.66,66.898 99.66,68.481 99.66,68.482 cw(c102.198,68.482) 102.198,71.021 102.3,71.023 102.439,71.027
NetFL302_1: FL302.1 U304.4 | length 6.9
  L1 Top Layer w0.32: 105.209,71.025 106.464,71.025 cw(c106.464,68.603) 108.887,68.603 FL302.1@108.887,66.8
NetFL302_2: FL302.2 U303.11 | length 6.4
  L1 Top Layer w0.32: 105.717,61.273 105.858,61.273 106.399,61.273 ccw(c106.399,63.76) 108.887,63.76 FL302.2@108.887,65.55
NetFL303_1: FL303.1 U304.6 | length 9.8
  L1 Top Layer w0.32: 105.193,71.831 105.35,71.831 107.621,71.831 cw(c107.621,67.706) 111.746,67.706 FL303.1@111.746,66.8
NetFL303_2: FL303.2 U303.9 | length 9.3
  L1 Top Layer w0.32: 105.71,60.476 105.858,60.476 107.571,60.476 ccw(c107.571,64.651) 111.746,64.651 FL303.2@111.746,65.55
NetJ201_A5: J201.A5 R205.2 | length 1.9
  L1 Top Layer w0.228: R205.2@62.25,89.524 J201.A5@62.25,91.388
NetJ201_B5: J201.B5 R207.2 | length 1.9
  L1 Top Layer w0.228: R207.2@59.25,89.521 J201.B5@59.25,91.388
NetL102_1: L102.1 U101.B2
NetL203_2: L203.2 U202.63 | length 5
  L1 Top Layer w0.254: U202.63@41.889,81.815 42.132,81.815 42.457,81.49 42.457,80.984 42.729,80.712 45.93,80.712 L203.2@46.052,80.834
NetQ201_4: Q201.4 R204.2 | length 1.5
  L1 Top Layer w0.254: Q201.4@71.28,92.892 71.42,92.892 71.503,92.975 71.503,93.115 71.693,93.305 72.42,93.305 R204.2@72.49,93.375
NetQ202_1: Q202.1 R260.2 R261.1 | length 2.4
  L1 Top Layer w0.203: R261.1@61.214,6.338 R260.2@62.23,6.338 62.23,7.658 Q202.1@62.214,7.674
NetQ202_2: Q202.2 R226.2 | length 1.6
  L1 Top Layer w0.203: Q202.2@62.214,9.574 63.492,9.574 R226.2@63.754,9.836
NetQ203_1: Q203.1 R263.2 R264.1 | length 2.4
  L1 Top Layer w0.203: R264.1@53.848,6.338 R263.2@54.864,6.338 54.864,7.658 Q203.1@54.848,7.674
NetQ203_2: Q203.2 R262.2 | length 1.6
  L1 Top Layer w0.203: Q203.2@54.848,9.574 56.184,9.574 R262.2@56.388,9.778
NetR101_1: R101.1 U101.C1 | length 1.9
  L1 Top Layer w0.203: U101.C1@93.965,87.775 93.965,88.211 93.965,89.649 R101.1@94.014,89.698
NetR102_2: R102.2 U102.12 | length 1.3
  L1 Top Layer w0.254: R102.2@104.967,89.795 105.091,89.672 105.091,88.603 U102.12@105.1,88.594
NetR105_2: R105.2 R106.1 U102.9 | length 5.5
  L1 Top Layer w0.254: R106.1@101.944,89.883 103.884,89.883 104.011,89.756 v1(104.064,89.756)
  L4 Bottom Layer w0.254: v1(104.064,89.756) 105.629,88.191 105.629,87.536 v1(105.629,87.08)
NetR201_2: R201.2 S201.2 | length 2
  L1 Top Layer w0.203: R201.2@44.958,92.71 S201.2@44.958,94.708
NetR202_2: R202.2 S202.2 | length 2
  L1 Top Layer w0.203: R202.2@51.308,92.71 S202.2@51.308,94.708
NetR210_2: R210.2 U202.57 | length 20.1
  L1 Top Layer w0.203: U202.57@39.241,79.885 39.243,79.884 39.243,79.399 39.659,78.983 v1(39.708,78.983)
  L4 Bottom Layer w0.203: v1(22.244,81.16) 24.546,78.857 31.688,78.857 31.753,78.922 32.393,79.562 39.13,79.562 v1(39.708,78.983)
NetR211_2: R211.2 U202.56 | length 7.2
  L1 Top Layer w0.203: U202.56@38.841,79.885 38.841,79.262 39.122,78.982 39.122,78.533 v1(39.169,78.486)
  L3 Inner 2 w0.203: v1(34.332,77.241) 34.961,77.241 36.637,78.917 37.918,78.917 38.35,78.486 v1(39.169,78.486)
NetR212_2: R212.2 U202.55 | length 52.5
  L1 Top Layer w0.203: v1(37.555,76.58) 37.555,76.61 38.665,77.719 38.665,78.922 38.665,78.936 38.441,79.159 U202.55@38.441,79.885 ; R212.2@81.026,86.677 v1(81.026,87.127)
  L3 Inner 2 w0.203: v1(37.555,76.58) 37.603,76.627 37.777,76.627 37.791,76.64 44.567,76.64 46.001,78.074 58.77,78.074 59.035,78.339 72.845,78.339 79.498,84.992 79.498,85.599 v1(81.026,87.127)
NetR213_2: R213.2 U202.54 | length 51.7
  L1 Top Layer w0.203: v1(37.127,77.128) 37.174,77.176 37.567,77.176 38.261,77.87 38.261,78.792 38.131,78.922 38.041,79.012 U202.54@38.041,79.885 ; R213.2@80.01,86.677 v1(80.01,87.127)
  L3 Inner 2 w0.203: v1(37.127,77.128) 37.171,77.084 37.764,77.084 37.827,77.021 44.409,77.021 45.843,78.455 58.612,78.455 58.877,78.72 72.687,78.72 78.482,84.515 78.482,85.599 v1(80.01,87.127)
NetR214_2: R214.2 U202.53 | length 49.6
  L1 Top Layer w0.203: v1(37.39,77.712) 37.405,77.712 37.879,78.185 37.879,78.623 37.641,78.86 37.641,78.922 U202.53@37.641,79.885 ; R214.2@78.994,86.677 v1(78.994,87.127)
  L3 Inner 2 w0.203: v1(37.39,77.712) 37.437,77.665 37.722,77.665 37.985,77.402 44.251,77.402 45.685,78.836 58.455,78.836 58.719,79.101 72.529,79.101 77.474,84.045 77.474,85.607 v1(78.994,87.127)
NetR215_2: R215.2 U202.52 | length 47
  L1 Top Layer w0.203: U202.52@37.241,79.885 U202.52@37.241,79.885 37.243,79.5 37.257,79.486 37.257,78.922 37.257,78.597 37.374,78.48 v1(37.374,78.413) ; R215.2@77.978,86.677 v1(77.978,87.127)
  L3 Inner 2 w0.203: v1(37.374,78.413) 37.422,78.366 37.582,78.366 38.164,77.783 44.093,77.783 45.527,79.217 58.297,79.217 59.267,80.188 71.578,80.188 76.45,85.06 76.45,85.599 v1(77.978,87.127)
NetR216_2: R216.2 U202.49 | length 46.5
  L1 Top Layer w0.203: v1(35.83,78.999) 35.83,79.066 36.04,79.275 U202.49@36.041,79.885 U202.49@36.041,79.885 ; R216.2@76.962,86.677 v1(76.962,87.127)
  L3 Inner 2 w0.203: v1(35.83,78.999) 35.83,79.066 36.363,79.598 58.139,79.598 59.112,80.571 71.387,80.571 75.434,84.619 75.434,85.599 v1(76.962,87.127)
NetR217_2: R217.2 U202.48 | length 45.1
  L1 Top Layer w0.203: U202.48@35.641,79.885 35.643,79.887 35.643,80.371 35.917,80.645 36.094,80.645 v1(36.141,80.692) ; R217.2@75.946,86.677 v1(75.946,87.127)
  L3 Inner 2 w0.203: v1(36.141,80.692) 36.208,80.692 36.474,80.959 41.115,80.959 42.075,79.999 42.564,79.999 57.974,79.999 59.687,81.712 71.071,81.712 74.418,85.06 74.418,85.599 v1(75.946,87.127)
NetR218_2: R218.2 U202.47 | length 44.7
  L1 Top Layer w0.203: U202.47@35.241,79.885 35.241,80.633 v1(35.652,81.044) ; R218.2@74.93,86.677 v1(74.93,87.127)
  L3 Inner 2 w0.203: v1(35.652,81.044) 35.719,81.044 35.99,81.315 41.262,81.315 42.197,80.38 42.564,80.38 57.794,80.38 59.513,82.099 70.442,82.099 73.41,85.067 73.41,85.607 v1(74.93,87.127)
NetR219_2: R219.2 U202.46 | length 44.2
  L1 Top Layer w0.203: U202.46@34.841,79.885 34.841,80.911 35.073,81.143 v1(35.073,81.209) ; R219.2@73.914,86.677 v1(73.914,87.127)
  L3 Inner 2 w0.203: v1(35.073,81.209) 35.073,81.239 35.505,81.671 41.409,81.671 42.318,80.761 42.564,80.761 57.621,80.761 59.341,82.481 69.808,82.481 72.394,85.067 72.394,85.607 v1(73.914,87.127)
NetR220_2: R220.2 U202.44 | length 44.4
  L1 Top Layer w0.203: U202.44@34.041,79.885 34.041,80.842 34.041,81.46 34.233,81.652 34.233,82.003 v1(34.28,82.05) ; R220.2@72.898,86.677 v1(72.898,87.127)
  L3 Inner 2 w0.203: v1(34.28,82.05) 34.347,82.05 34.679,82.382 41.729,82.382 42.564,81.547 42.566,81.545 56.907,81.545 58.226,82.864 69.174,82.864 71.37,85.06 71.37,85.507 72.775,86.912 72.775,86.937 72.898,87.06 v1(72.898,87.127)
NetR221_2: R221.2 U202.43 | length 43.7
  L1 Top Layer w0.203: U202.43@33.641,80.209 33.641,82.141 33.731,82.231 v1(33.731,82.298) ; R221.2@71.882,86.677 v1(71.882,87.127)
  L3 Inner 2 w0.203: v1(33.731,82.298) 33.746,82.298 34.185,82.737 42.564,82.737 42.808,82.737 43.611,81.934 56.757,81.934 58.068,83.245 68.539,83.245 70.354,85.06 70.354,85.599 v1(71.882,87.127)
NetR231_1: R231.1 U202.25 | length 42.1
  L1 Top Layer w0.203: U202.25@31.691,87.035 32.013,87.035 32.015,87.037 32.076,87.037 32.119,87.079 33.12,87.079 33.639,86.559 v1(33.639,86.519) ; R231.1@69.85,86.677 v1(69.85,87.127)
  L3 Inner 2 w0.203: v1(33.639,86.519) 33.706,86.519 34.023,86.835 42.564,86.835 42.733,86.835 44.061,85.507 56.733,85.507 58.614,83.626 66.888,83.626 68.33,85.067 68.33,85.607 v1(69.85,87.127)
NetR232_1: R232.1 U202.23 | length 40.8
  L1 Top Layer w0.203: U202.23@31.691,87.835 33.041,87.835 v1(33.614,87.262) ; R232.1@68.834,86.677 v1(68.834,87.127)
  L3 Inner 2 w0.203: v1(33.614,87.262) 33.643,87.233 42.564,87.233 55.569,87.233 58.795,84.007 66.253,84.007 67.314,85.067 67.314,85.607 v1(68.834,87.127)
NetR233_1: R233.1 U202.22 | length 39.6
  L1 Top Layer w0.203: U202.22@31.691,88.235 33.252,88.235 33.581,87.906 v1(33.647,87.906)
  L1 Top Layer w0.254: R233.1@67.818,86.677 v1(67.818,87.127)
  L3 Inner 2 w0.203: v1(33.647,87.906) 33.939,87.614 42.564,87.614 55.726,87.614 58.953,84.388 65.618,84.388 66.298,85.067 66.298,85.607 v1(67.818,87.127)
NetR234_1: R234.1 U202.21 | length 38.1
  L1 Top Layer w0.203: U202.21@32.093,88.633 33.357,88.633 33.529,88.46 33.925,88.46 v1(33.973,88.413)
  L1 Top Layer w0.254: R234.1@66.802,86.677 v1(66.802,87.127)
  L3 Inner 2 w0.203: v1(33.973,88.413) 34.39,87.995 42.564,87.995 55.884,87.995 59.111,84.769 64.983,84.769 65.282,85.067 65.282,85.607 v1(66.802,87.127)
NetR235_1: R235.1 U202.20 | length 40.5
  L1 Top Layer w0.203: v1(32.677,92.871) 32.677,92.805 32.841,92.641 32.841,90.745 U202.20@32.841,89.785
  L1 Top Layer w0.254: v1(65.775,87.124) 65.78,87.118 65.78,86.683 R235.1@65.786,86.677
  L3 Inner 2 w0.203: v1(32.677,92.871) 33.707,92.871 34.017,92.561 36.988,92.561 37.376,92.95 51.469,92.95 58.583,85.835 64.494,85.835 65.775,87.116 v1(65.775,87.124)
NetR236_1: R236.1 U202.19 | length 39.5
  L1 Top Layer w0.203: U202.19@33.241,89.785 33.241,93.595 v1(33.244,93.597)
  L1 Top Layer w0.254: v1(64.754,87.086) 64.762,87.078 64.762,86.685 R236.1@64.77,86.677
  L3 Inner 2 w0.203: v1@33.257,93.611 33.304,93.564 33.553,93.564 34.175,92.942 34.534,92.942 36.798,92.942 37.186,93.331 51.627,93.331 58.741,86.216 63.888,86.216 64.754,87.082 v1(64.754,87.086)
NetR237_1: R237.1 U202.18 | length 37.8
  L1 Top Layer w0.203: U202.18@33.641,89.785 33.641,90.745 33.641,93.261 34.088,93.709 v1(34.088,93.742)
  L1 Top Layer w0.254: R237.1@63.754,86.677 63.779,86.702 63.779,87.123 v1(63.804,87.148)
  L3 Inner 2 w0.203: v1(34.088,93.742) 34.136,93.695 34.32,93.695 34.691,93.323 36.592,93.323 36.98,93.712 51.784,93.712 58.882,86.614 63.269,86.614 v1(63.804,87.148)
NetR238_1: R238.1 U202.17 | length 35.8
  L1 Top Layer w0.203: U202.17@34.041,89.785 34.041,90.745 34.041,92.969 v1(34.9,93.828)
  L1 Top Layer w0.254: R238.1@62.738,86.677 v1(62.738,87.127)
  L3 Inner 2 w0.203: v1(34.9,93.828) 34.967,93.828 35.09,93.704 36.39,93.704 36.778,94.093 51.957,94.093 58.928,87.122 62.733,87.122 v1(62.738,87.127)
NetR239_1: R239.1 U202.16 | length 25.2
  L1 Top Layer w0.203: R239.1@19.812,77.649 v1(19.812,78.099) ; v1(34.166,88.984) 34.197,88.984 34.44,89.226 34.44,89.784 U202.16@34.441,89.785
  L2 Inner 1 w0.203: v1@19.812,78.118 20.679,78.984 21.552,78.984 26.411,83.843 26.411,84.489 30.526,88.604 30.526,91.356 v1(30.926,91.756)
  L3 Inner 2 w0.203: v1(30.926,91.756) 31.242,91.44 31.367,91.315 32.926,91.315 33.497,90.745 34.166,90.076 v1(34.166,88.984)
NetR240_1: R240.1 U202.14 | length 26.1
  L1 Top Layer w0.203: R240.1@20.828,77.649 v1(20.828,78.099) ; v1(34.574,88.495) 34.574,88.561 34.697,88.685 34.697,88.757 35.24,89.299 35.24,89.784 U202.14@35.241,89.785
  L2 Inner 1 w0.203: v1(20.828,78.099) 21.332,78.603 21.4,78.603 21.722,78.603 26.789,83.671 26.789,83.683 26.792,83.686 26.792,84.331 30.799,88.339 30.908,88.448 30.908,90.745 30.908,90.97 31.689,91.752 31.689,91.98 v1(31.737,92.028)
  L3 Inner 2 w0.203: v1@31.737,92.022 31.809,92.022 32.135,91.696 33.099,91.696 34.05,90.745 34.648,90.148 34.648,88.737 34.621,88.71 34.621,88.542 v1(34.574,88.495)
NetR241_1: R241.1 U202.13 | length 42.6
  L1 Top Layer w0.203: U202.13@35.643,90.109 35.643,90.17 35.654,90.182 35.654,90.283 36.026,90.654 36.026,90.745 36.026,93.958 36.182,94.114 36.182,94.21 v1(36.229,94.257) ; v1(70.856,87.102) 70.86,87.097 70.86,86.694 R241.1@70.865,86.689
  L3 Inner 2 w0.203: v1(36.229,94.257) 36.296,94.257 36.512,94.474 52.115,94.474 58.936,87.653 70.371,87.653 70.856,87.168 v1(70.856,87.102)
NetR242_1: R242.1 U202.12 | length 26.1
  L1 Top Layer w0.203: R242.1@21.844,77.649 v1(21.844,78.099) ; v1(35.176,88.474) 35.223,88.522 35.372,88.522 36.041,89.191 U202.12@36.041,89.785
  L2 Inner 1 w0.203: v1(21.844,78.099) 21.844,78.166 21.967,78.289 21.967,78.31 27.222,83.565 27.222,84.219 30.799,87.796 31.289,88.286 31.289,90.812 32.29,91.813 32.29,92.164 v1(32.337,92.212)
  L3 Inner 2 w0.203: v1(32.337,92.212) 33.142,92.212 34.608,90.745 35.019,90.335 35.019,88.727 35.052,88.693 35.052,88.665 35.176,88.541 v1(35.176,88.474)
NetR243_1: R243.1 U202.11 | length 22.4
  L1 Top Layer w0.203: R243.1@22.86,77.649 22.864,77.653 22.864,78.086 v1(22.869,78.09) ; U202.11@36.441,89.785 36.443,89.784 36.443,89.153 36.576,89.02 v1(36.576,88.953)
  L2 Inner 1 w0.203: v1(22.869,78.09) 23.364,77.595 26.117,77.595 26.42,77.897 26.42,78.308 26.768,78.656 26.768,80.948 28.749,82.929 28.749,83.527 30.319,85.098 30.799,85.098 31.617,85.098 31.623,85.092 32.947,85.092 35.655,87.8 35.655,88.601 36.007,88.953 v1(36.576,88.953)
NetR244_1: R244.1 U202.9 | length 25.6
  L1 Top Layer w0.203: R244.1@23.876,77.649 v1(23.876,78.099) ; U202.9@37.241,89.785 37.241,91.111 38.044,91.914 v1(38.079,91.914)
  L2 Inner 1 w0.203: v1(23.876,78.099) 23.876,79.672 27.606,83.402 27.606,84.047 30.799,87.241 31.645,88.086 31.645,90.603 31.787,90.745 32.347,91.305 37.435,91.305 38.044,91.914 v1(38.079,91.914)
NetR245_1: R245.1 U202.8 | length 22.7
  L1 Top Layer w0.203: R245.1@24.892,77.649 v1(24.892,78.099) ; U202.8@37.641,89.785 37.641,90.715 37.672,90.745 37.986,91.059 37.986,91.076 38.11,91.2 v1(38.11,91.266)
  L2 Inner 1 w0.203: v1(24.892,78.099) 24.892,80.15 27.987,83.244 27.987,83.89 30.799,86.702 32.795,88.698 32.795,89.214 34.326,90.745 34.449,90.868 34.565,90.868 34.568,90.872 37.715,90.872 v1(38.11,91.266)
NetR246_1: R246.1 U202.7 | length 20.9
  L1 Top Layer w0.203: R246.1@25.908,77.649 v1(25.908,78.099) ; U202.7@38.041,89.785 38.043,89.787 38.043,90.372 38.12,90.449 v1(38.12,90.516)
  L2 Inner 1 w0.203: v1(25.908,78.099) 25.929,78.12 25.929,79.593 25.714,79.807 25.714,80.433 28.368,83.087 28.368,83.732 30.799,86.163 33.15,88.514 33.15,88.951 34.716,90.516 v1(38.12,90.516)
NetR247_1: R247.1 U202.6 | length 19.3
  L1 Top Layer w0.203: R247.1@26.924,77.649 v1(26.924,78.099) ; v1(36.205,88.474) 37.615,88.474 38.44,89.299 38.44,89.784 U202.6@38.441,89.785
  L2 Inner 1 w0.203: v1(26.924,78.099) 27.197,78.372 27.197,80.838 29.131,82.772 29.131,83.371 30.477,84.717 30.799,84.717 33.075,84.717 36.205,87.848 v1(36.205,88.474)
NetR248_1: R248.1 U202.4 | length 24.5
  L1 Top Layer w0.203: R248.1@27.94,77.649 v1(27.94,78.099) ; U202.4@39.241,89.785 39.243,89.787 39.243,90.17 39.265,90.193 39.265,90.703 40.013,91.451 v1(41.402,91.451)
  L2 Inner 1 w0.203: v1(27.94,78.099) 27.6,78.439 27.6,80.067 28.318,80.785 29.661,80.785 32.915,84.04 32.915,84.042 40.324,91.451 v1(41.402,91.451)
NetR249_1: R249.1 U202.3 | length 25.7
  L1 Top Layer w0.203: R249.1@28.956,77.649 v1(28.956,78.099) ; U202.3@39.641,89.785 39.641,90.524 40.064,90.947 43.328,90.947 v1(43.353,90.921)
  L2 Inner 1 w0.203: v1(28.956,78.099) 28.973,78.116 28.973,79.561 29.816,80.404 29.818,80.404 30.799,81.385 33.271,83.856 33.271,83.868 39.609,90.206 41.591,90.206 42.13,90.745 42.331,90.947 43.328,90.947 v1(43.353,90.921)
NetR250_1: R250.1 U202.2 | length 23.2
  L1 Top Layer w0.203: R250.1@29.972,77.649 v1(29.972,78.099) ; U202.2@40.052,89.926 40.052,90.28 40.332,90.56 42.734,90.56 42.852,90.442 v1(42.919,90.442)
  L2 Inner 1 w0.203: v1(29.972,78.099) 29.972,78.166 29.843,78.295 29.843,79.89 32.305,82.352 32.305,82.366 33.626,83.688 33.626,83.72 39.756,89.85 41.793,89.85 42.384,90.442 v1(42.919,90.442)
NetR251_1: R251.1 U202.1 | length 18.6
  L1 Top Layer w0.203: R251.1@30.988,77.649 v1(30.988,78.099) ; U202.1@40.441,89.785 41.147,89.785 v1(41.652,89.28)
  L2 Inner 1 w0.203: v1@31.001,78.099 31.381,78.479 31.381,78.922 31.381,80.925 32.661,82.205 32.661,82.219 39.728,89.286 v1@41.646,89.286
NetR252_1: R252.1 U202.80 | length 24.5
  L1 Top Layer w0.203: U202.80@41.591,88.635 41.913,88.635 42.829,89.551 42.944,89.551 v1(42.991,89.598)
  L4 Bottom Layer w0.203: v1(22.294,85.174) 29.04,85.174 30.799,86.933 33.697,89.831 42.564,89.831 42.757,89.831 42.99,89.598 v1(42.991,89.598)
NetR253_1: R253.1 U202.79 | length 21.8
  L1 Top Layer w0.203: v1(40.772,88.801) 40.819,88.754 40.819,88.523 41.106,88.237 U202.79@41.268,88.237
  L4 Bottom Layer w0.203: v1(22.294,84.158) 28.563,84.158 30.799,86.394 33.88,89.475 40.098,89.475 v1(40.772,88.801)
NetR254_1: R254.1 U202.78 | length 22.3
  L1 Top Layer w0.203: v1(40.132,88.764) 40.132,88.708 41.003,87.837 41.59,87.837 U202.78@41.591,87.835
  L4 Bottom Layer w0.203: v1(22.294,83.142) 22.301,83.135 28.175,83.135 30.133,85.092 30.799,85.092 33.53,85.092 37.541,89.103 39.754,89.103 40.092,88.764 v1(40.132,88.764)
NetR255_1: R255.1 U202.77 | length 23.3
  L1 Top Layer w0.203: v1(39.603,88.474) 39.603,88.408 39.769,88.242 40.575,87.435 U202.77@41.591,87.435
  L4 Bottom Layer w0.203: v1(22.294,82.126) 23.14,81.28 30.799,81.28 30.806,81.28 38.259,88.733 39.345,88.733 v1(39.603,88.474)
NetR265_2: R265.2 U202.34 | length 10
  L1 Top Layer w0.203: R265.2@26.179,89.653 26.21,89.623 26.21,88.957 v1(26.24,88.927) ; v1(30.331,83.857) 30.38,83.857 30.802,83.435 U202.34@31.691,83.435
  L3 Inner 2 w0.203: v1(26.24,88.927) 26.961,88.207 28.51,88.207 30.331,86.386 v1(30.331,83.857)
NetR266_2: R266.2 U202.33 | length 9.3
  L1 Top Layer w0.203: R266.2@28.002,89.655 28.021,89.674 28.021,90.275 v1(28.04,90.294) ; v1(30.853,84.156) 30.901,84.109 30.901,84.032 31.096,83.837 31.69,83.837 U202.33@31.691,83.835
  L3 Inner 2 w0.203: v1(28.04,90.294) 28.582,90.294 30.799,88.077 30.853,88.023 v1(30.853,84.156)
NetR305_2: R305.2 U301.22 | length 2.1
  L1 Top Layer w0.203: R305.2@99.445,48.527 100.391,47.582 U301.22@101.187,47.582
NetR310_1: R310.1 R311.1 U301.5 | length 3
  L1 Top Layer w0.203: U301.5@106.087,48.582 107.243,48.582 R310.1@107.805,48.019 R311.1@107.805,47.003
NetR312_2: R312.2 R315.1 U303.2 | length 2.2
  L1 Top Layer w0.152: R312.2@104.079,63.224 104.133,63.17 U303.2@104.133,62.026
  L1 Top Layer w0.203: R315.1@103.063,63.224 R312.2@104.079,63.224
NetR313_2: R313.2 R316.1 U303.1 | length 2.4
  L1 Top Layer w0.152: U303.1@104.533,62.026 104.533,62.662 R313.2@105.02,63.149
  L1 Top Layer w0.203: R313.2@105.02,63.149 R313.2@105.095,63.224 R316.1@106.111,63.224
NetR314_2: R314.2 U301.30 | length 1.7
  L1 Top Layer w0.203: U301.30@104.387,45.882 104.422,45.847 104.422,45.317 104.653,45.086 104.895,44.843 R314.2@104.895,44.347
NetR317_2: R317.2 R319.1 U304.2 | length 2.2
  L1 Top Layer w0.152: R317.2@104.025,69.133 U304.2@104.025,70.277
  L1 Top Layer w0.203: R317.2@104.079,69.079 R319.1@105.095,69.079
NetR318_2: R318.2 R320.1 U304.1 | length 2.3
  L1 Top Layer w0.152: R318.2@103.138,69.154 103.625,69.641 U304.1@103.625,70.277
  L1 Top Layer w0.203: R320.1@102.047,69.079 R318.2@103.063,69.079
NetR509_2: R509.2 U501.6 | length 1.7
  L1 Top Layer w0.32: 67.744,60.196 67.92,60.196 69.189,60.196 69.195,60.19 69.437,60.19 R509.2@69.442,60.196
NetR510_2: R510.2 U502.6 | length 0.9
  L1 Top Layer w0.32: 43.651,66.407 43.651,66.241 43.651,65.973 R510.2@43.968,65.657
NetR515_1: R515.1 U501.4 | length 24.4
  L1 Top Layer w0.32: 67.77,59.393 cw(c67.77,56.99) 67.92,59.388 cw(c67.92,57.336) 69.371,58.787 70.477,57.68 70.857,57.3 70.859,57.299 ccw(c75.51,61.95) 75.51,55.372 75.512,55.372 76.054,55.372 cw(c76.053,46.807) 84.617,46.807 R515.1@84.617,45.481
NetR515_2: R515.2 R519.2 R523.1 | length 2
  L1 Top Layer w0.254: R523.1@84.617,43.565 84.617,44.073 ; R515.2@84.617,44.581 84.617,44.073 ; R519.2@85.633,44.073 84.617,44.073